# EAGLE board OpenReader_Board (EAGLE 9.7.0)
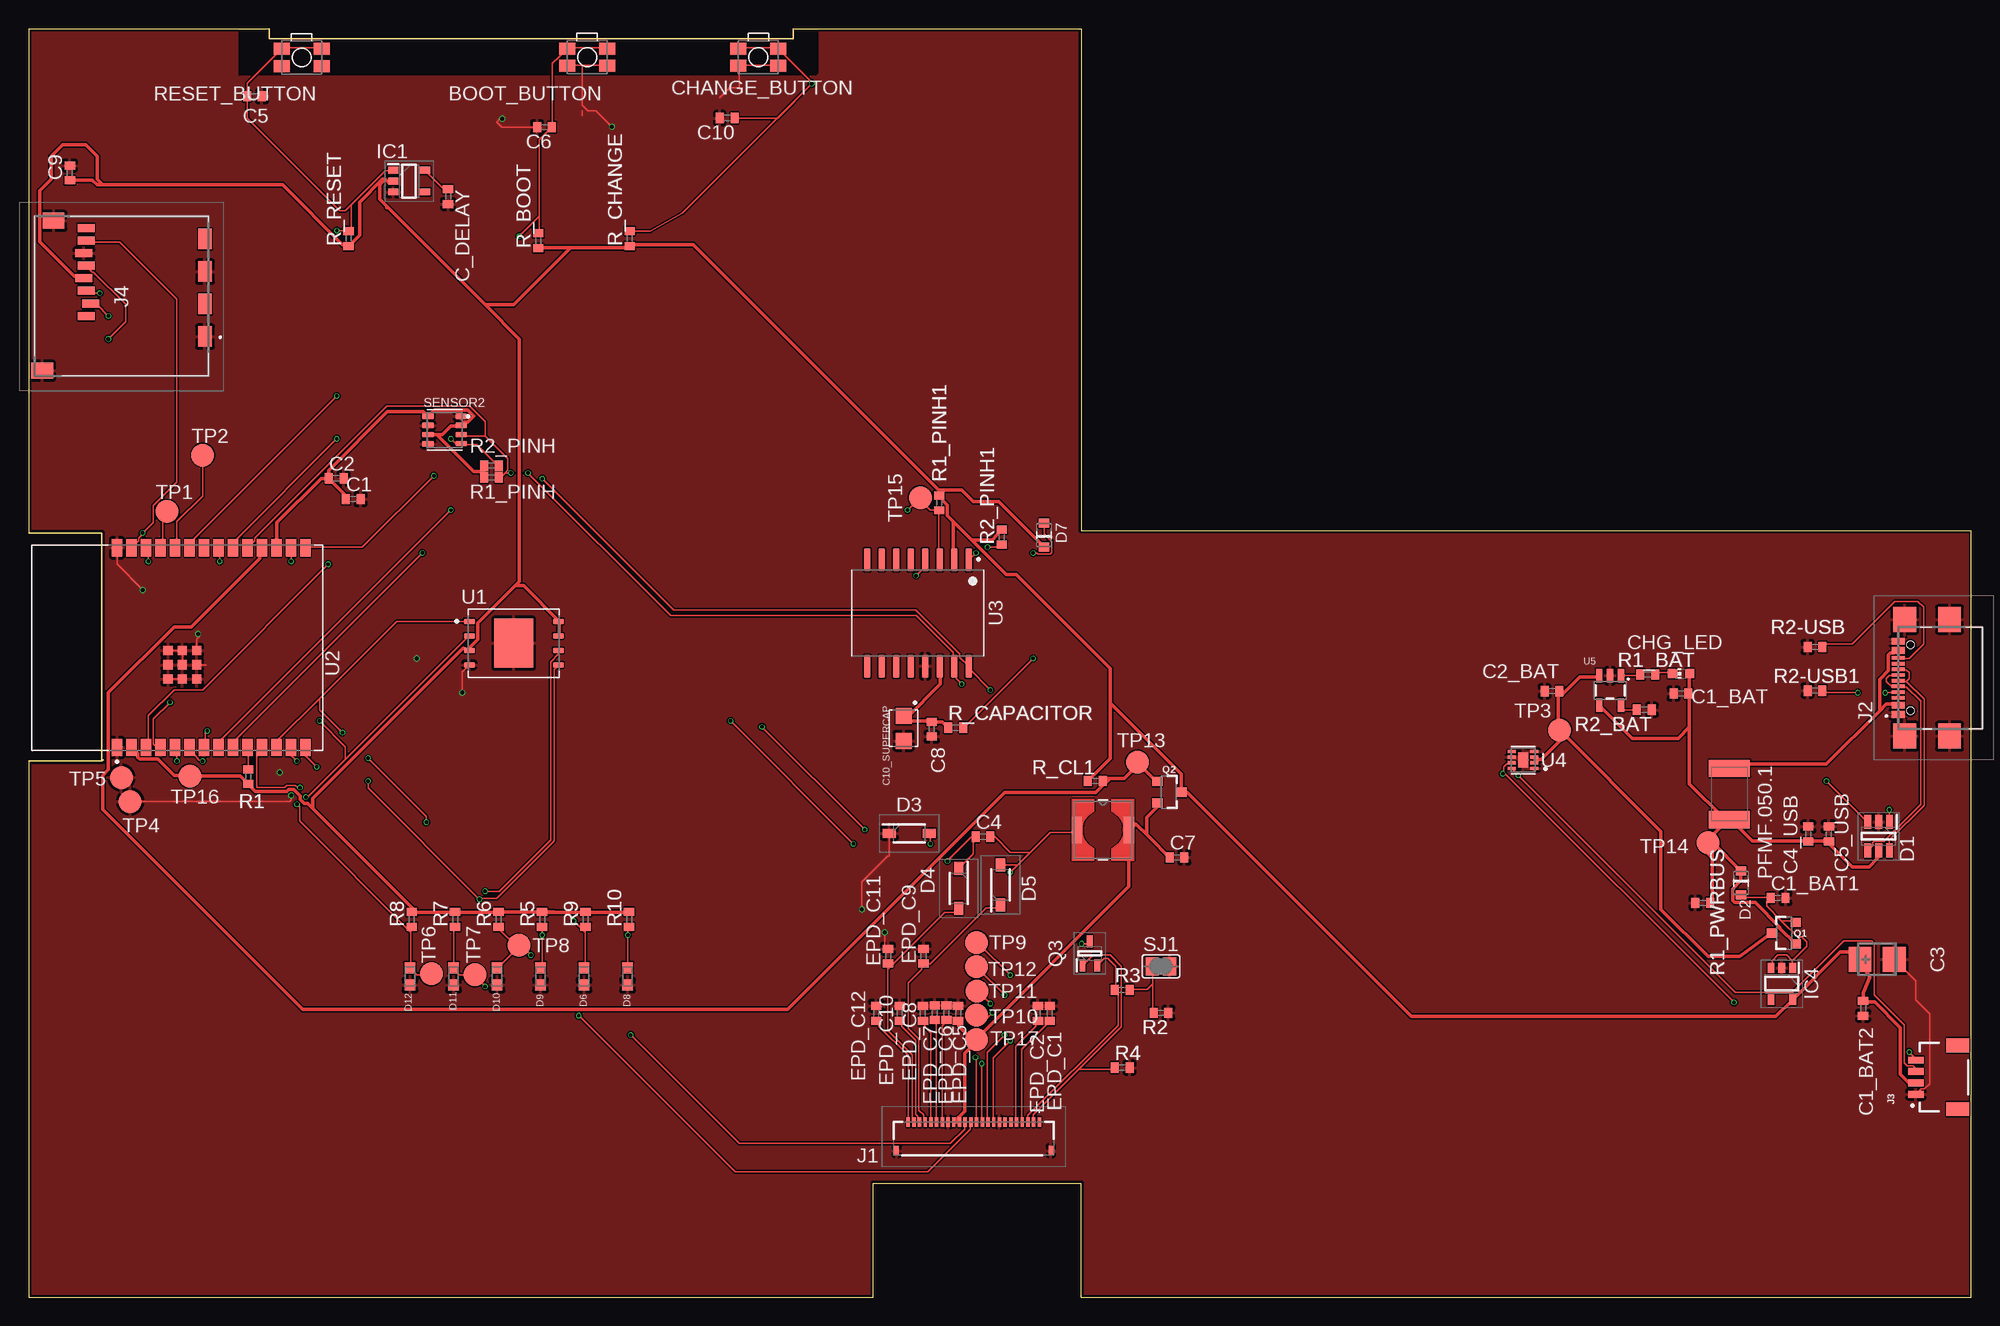
[diagram p0: board, top side]
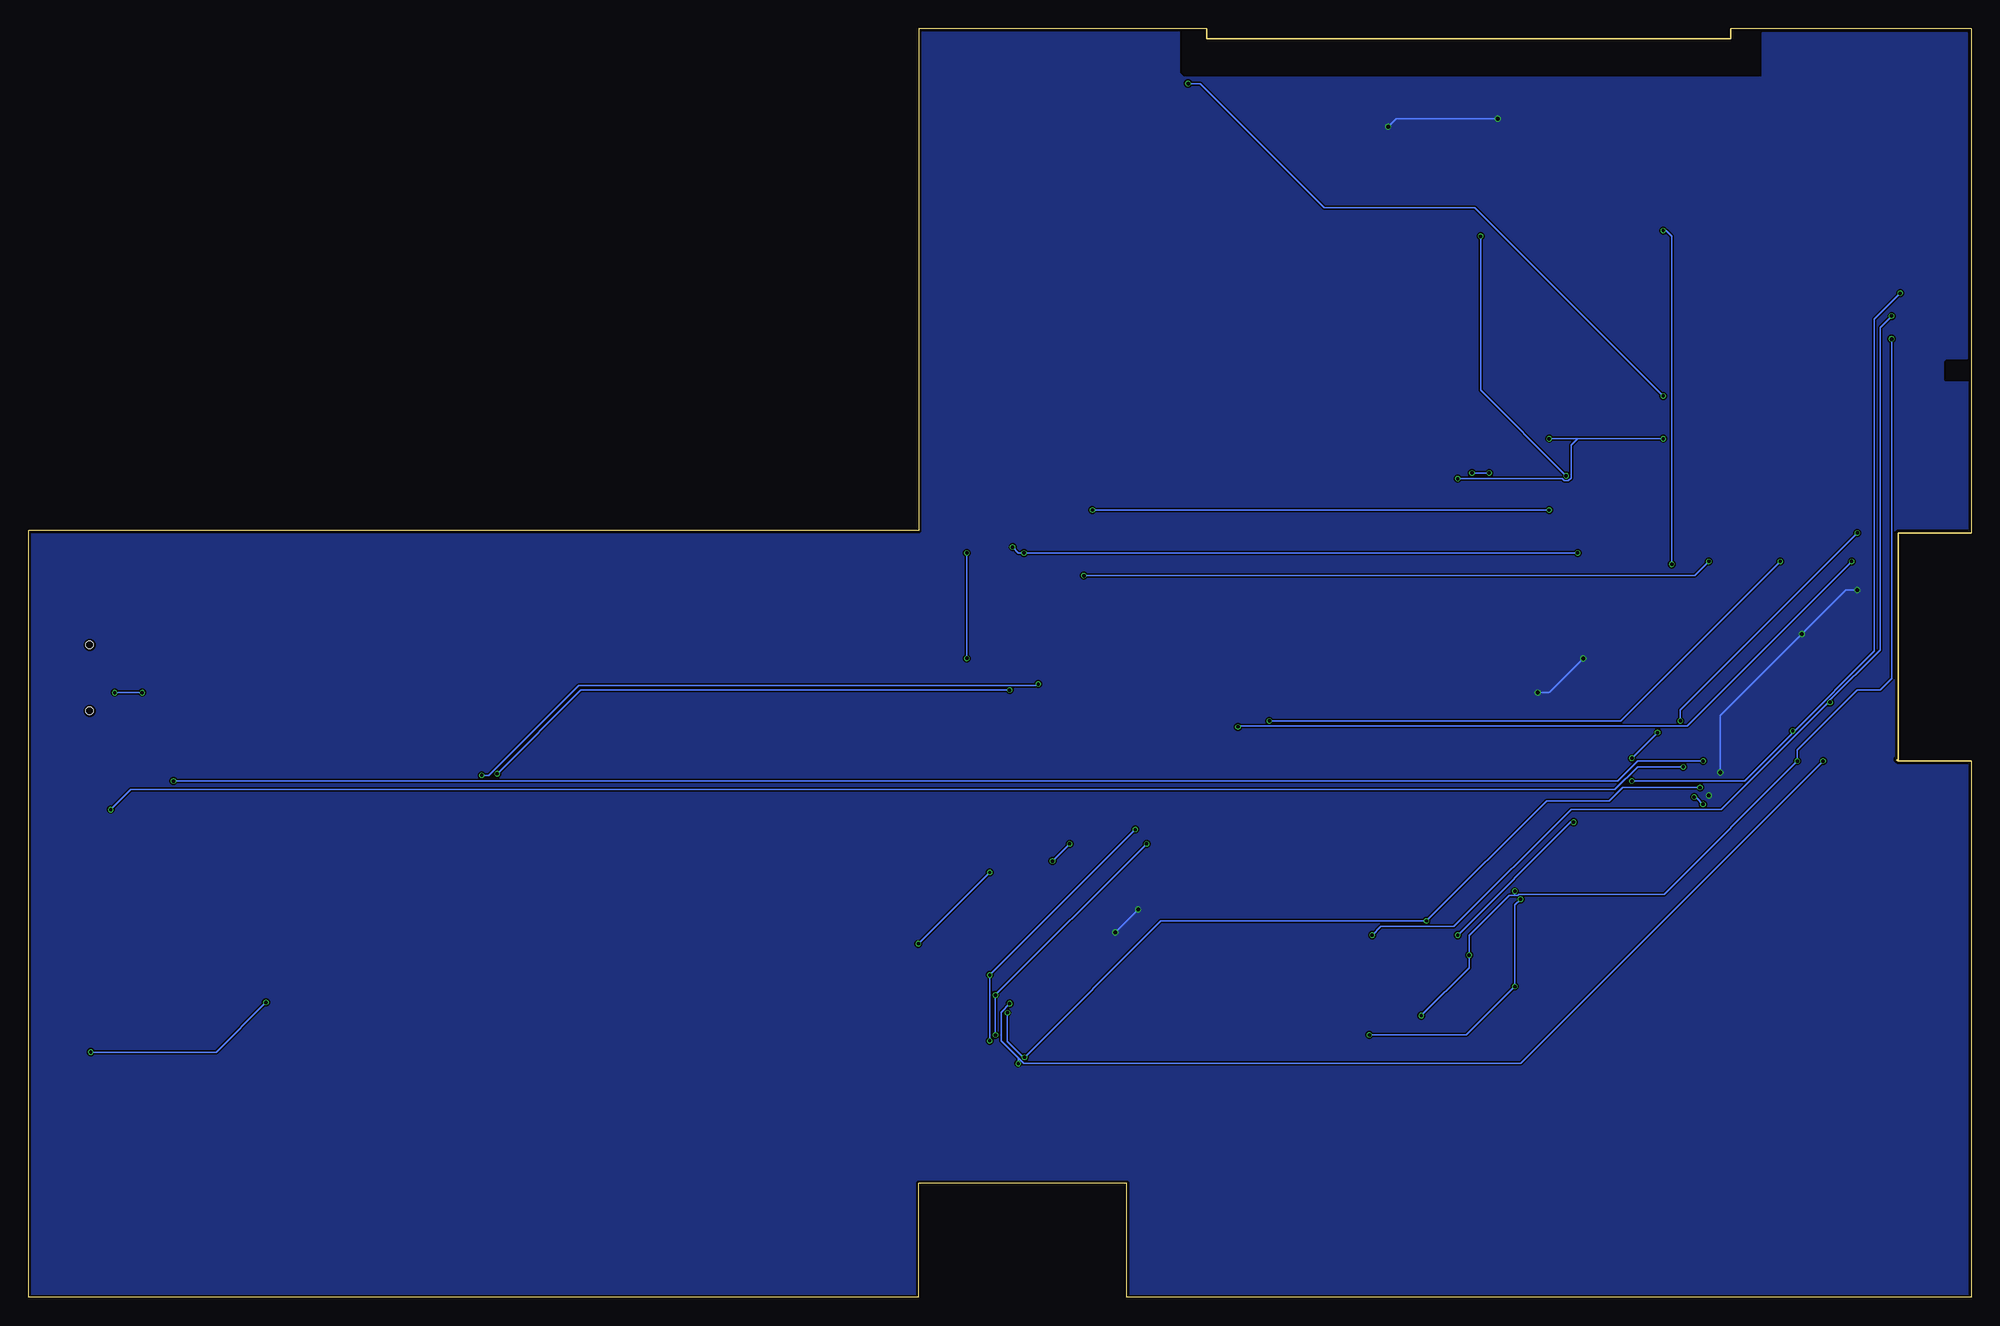
[diagram p1: board, bottom side, seen from below]

Size 170.2 x 111.2 mm. Coordinates in mm from the lower left corner, seen from the top.
Outline: 6.55,47.12 6.43,47
Outline: 6.43,47 0,47 0,0 74,0 74,10 92.2,10 92.2,0 170.2,0 170.2,67.2 92.2,67.2 92.2,111.2 67,111.2 67,110.3 21.1,110.3 21.1,111.2 0,111.2 0,67 6.43,67 6.43,47
Copper layers (1*16): Top 0.035mm / dielectric 1.6mm / Bottom 0.035mm
Design rules "jlcpcb-2layers.dru *": minimum track width 0.15mm, minimum drill 0.3mm, track to track 5mil, track to pad 5mil, pad to pad 5mil, via to via 5mil, smd to smd 5mil, copper to edge 0.2mm, drill to drill 6mil, minimum pad ring 10mil, minimum via ring 3mil, stop-mask expansion 4mil, vias tented up to drill 0mil, thermal gap 10mil
Net classes: 1 POWER_ROUTES: width 0.3 mm

## Footprints (pad centres in the part's own frame; a part is rotated, then mirrored left to right if it is on the bottom)
MYBUTTON = smd 1.4 x 1.05: 1 1.75,0.75; 2 -1.75,0.75; 3 -1.75,-0.75; 4 1.75,-0.75
EAGLE-LTSPICE_C0402 = smd 0.7 x 0.9: 1 -0.65,0; 2 0.65,0
RCL_CT3528 = smd 2 x 2.2: + -1.5,0; - 1.5,0
CAPCP3225X100N = smd 1.4 x 1.4: 1 -1.1,0; 2 1.1,0
ADAFRUIT_CHIP-LED0603 = smd 0.8 x 0.8: A 0,-0.75; C 0,0.75
SOT95P280X145-6N = smd 1.2 x 0.6: 1 -1.25,0.95; 2 -1.25,0; 3 -1.25,-0.95; 4 1.25,-0.95; 5 1.25,0; 6 1.25,0.95
ESP32_WROVER_AVX---SD0805S020S1R0_AVX_SD0805S020S1R0_0 = smd 0.8 x 0.9: 1 -1.05,0; 2 1.05,0
SOD3716X135N = smd 1.15 x 0.8: 1 -1.75,0; 2 1.75,0
DIOC1608X36N = smd 0.97 x 0.94: 1 -0.75,0; 2 0.75,0
SOT95P280X125-5N = smd 0.9 x 0.6: 1 -1.4,0.95; 2 -1.4,0; 3 -1.4,-0.95; 4 1.4,-0.95; 5 1.4,0.95
SOT95P280X120-5N = smd 0.9 x 0.6: 1 -1.4,0.95; 2 -1.4,0; 3 -1.4,-0.95; 4 1.4,-0.95; 5 1.4,0.95
FH34SRJ24S05SH99 = smd 0.3 x 0.8: 1 5.75,1.45; 2 5.25,1.45; 3 4.75,1.45; 4 4.25,1.45; 5 3.75,1.45; 6 3.25,1.45; 7 2.75,1.45; 8 2.25,1.45; 9 1.75,1.45; 10 1.25,1.45; 11 0.75,1.45; 12 0.25,1.45; 13 -0.25,1.45; 14 -0.75,1.45; 15 -1.25,1.45; 16 -1.75,1.45; 17 -2.25,1.45; 18 -2.75,1.45; 19 -3.25,1.45; 20 -3.75,1.45; 21 -4.25,1.45; 22 -4.75,1.45; 23 -5.25,1.45; 24 -5.75,1.45 | smd 0.4 x 0.8: MP1 6.75,-1.05; MP2 -6.75,-1.05
SAMACSYS_PARTS_USB4110GFA = smd 0.3 x 1.15: A1 -3.35,3.678; A4 -2.55,3.678; A5 -1.25,3.678; A6 -0.25,3.678; A7 0.25,3.678; A8 1.25,3.678; A9 2.55,3.678; A12 3.35,3.678; B1 3.05,3.678; B4 2.25,3.678; B5 1.75,3.678; B6 0.75,3.678; B7 -0.75,3.678; B8 -1.75,3.678; B9 -2.25,3.678; B12 -3.05,3.678 | smd 2.18 x 2: MP1 -5.11,-0.827; MP2 5.11,-0.827; MP3 -5.11,3.103; MP4 5.11,3.103 | hole 0.65: -2.89,2.603; 2.89,2.603
JST04_1MM_RA = smd 0.6 x 1.35: 1 -1.5,0; 2 -0.5,0; 3 0.5,0; 4 1.5,0 | smd 1.2 x 2: NC1 2.8,-3.675; NC2 -2.8,-3.675
112ATAARR03ATTEND = smd 1.8 x 1.2: G1 10.6,10.4; G2 4.9,10.4; S1 7.75,10.4; S2 2.05,10.4 | smd 1.4 x 1.9: G3 13.6,-3.85; G4 0.45,-2.85 | smd 0.7 x 1.5: P1 8.8,0; P2 7.7,0.4; P3 6.6,0; P4 5.5,-0.2; P5 4.4,0; P6 3.3,-0.2; P7 2.2,0; P8 1.1,0
IND_4828-WE-TPC_WRE = smd 0.889 x 2.286: 1 -2.286,0; 2 2.286,0
ESP32C6_VARISTOR_CT/CN1812 = smd 1.5 x 3.6: 1 -2.25,0; 2 2.25,0
ESP32_WROVER_SPARKFUN-DISCRETESEMI_SOT23-3 = smd 0.8 x 0.9: 1 -0.95,-1; 2 0.95,-1; 3 0,1.1
SOT65P210X110-3N = smd 1.05 x 0.5: 1 -1.05,0.65; 2 -1.05,-0.65; 3 1.05,0
ESP32_WROVER_EAGLE-LTSPICE_R0402 = smd 0.7 x 0.9: 1 -0.65,0; 2 0.65,0
ESP32_WROVER_BME680_PSON80P300X300X100-8N = smd 1.016 x 0.5: 1 1.458,1.2; 2 1.458,0.4; 3 1.458,-0.4; 4 1.458,-1.2; 5 -1.458,-1.22; 6 -1.458,-0.4; 7 -1.458,0.4; 8 -1.458,1.2
SJ = smd 1.168 x 1.6: 1 -0.762,0; 2 0.762,0
TP20R = smd 2 x 2: TP 0,0
SON127P600X800X80-9N = smd 0.94 x 0.44: 1 -3.895,1.905; 2 -3.895,0.635; 3 -3.895,-0.635; 4 -3.895,-1.905; 5 3.895,-1.905; 6 3.895,-0.635; 7 3.895,0.635; 8 3.895,1.905 | smd 3.4 x 4.3: 9 0,0
XCVR_ESP32-C6-WROOM-1-N8 = smd 1.5 x 0.9: 1 -8.75,5.26; 2 -8.75,3.99; 3 -8.75,2.72; 4 -8.75,1.45; 5 -8.75,0.18; 6 -8.75,-1.09; 7 -8.75,-2.36; 8 -8.75,-3.63; 9 -8.75,-4.9; 10 -8.75,-6.17; 11 -8.75,-7.44; 12 -8.75,-8.71; 13 -8.75,-9.98; 14 -8.75,-11.25; 15 8.75,-11.25; 16 8.75,-9.98; 17 8.75,-8.71; 18 8.75,-7.44; 19 8.75,-6.17; 20 8.75,-4.9; 21 8.75,-3.63; 22 8.75,-2.36; 23 8.75,-1.09; 24 8.75,0.18; 25 8.75,1.45; 26 8.75,2.72; 27 8.75,3.99; 28 8.75,5.26 | smd 0.8 x 0.8: 29_1 -2.755,0.79; 29_2 -1.505,0.79; 29_3 -0.255,0.79; 29_4 -2.755,-0.46; 29_5 -1.505,-0.46; 29_6 -0.255,-0.46; 29_7 -2.755,-1.71; 29_8 -1.505,-1.71; 29_9 -0.255,-1.71
SOIC127P1032X265-16N = smd 2.05 x 0.59: 1 -4.655,4.445; 2 -4.655,3.175; 3 -4.655,1.905; 4 -4.655,0.635; 5 -4.655,-0.635; 6 -4.655,-1.905; 7 -4.655,-3.175; 8 -4.655,-4.445; 9 4.655,-4.445; 10 4.655,-3.175; 11 4.655,-1.905; 12 4.655,-0.635; 13 4.655,0.635; 14 4.655,1.905; 15 4.655,3.175; 16 4.655,4.445
SON50P200X200X80-9N = smd 0.76 x 0.27: 1 -0.985,0.75; 4 -0.985,-0.75; 5 0.985,-0.75; 8 0.985,0.75 | smd 0.775 x 0.305: 2 -0.985,0.25; 3 -0.985,-0.25 | smd 0.775 x 0.27: 6 0.985,-0.25; 7 0.985,0.25 | smd 0.9 x 1.3: 9 0,0
SOT23-5 = smd 0.55 x 1.2: 1 -0.95,-1.3; 2 0,-1.3; 3 0.95,-1.3; 4 0.95,1.3; 5 -0.95,1.3

## Placement (x,y rotation side)
BOOT_BUTTON  BUTTON_CUSYOMV1""  [MYBUTTON]  48.93,108.67 180 top
C1  100nF  [EAGLE-LTSPICE_C0402]  28.45,69.97 0 top
C1_BAT  4.7uF  [EAGLE-LTSPICE_C0402]  144.75,52.92 180 top
C1_BAT1  4.7uF  [EAGLE-LTSPICE_C0402]  153.26,35.01 0 top
C1_BAT2  4.7uF  [EAGLE-LTSPICE_C0402]  160.71,25.34 270 top
C2  100nF  [EAGLE-LTSPICE_C0402]  26.95,71.78 0 top
C2_BAT  4.7uF  [EAGLE-LTSPICE_C0402]  133.45,53.13 180 top
C3  100uF TANT  [RCL_CT3528]  161.93,29.63 0 top
C4  4.7uF/25V  [EAGLE-LTSPICE_C0402]  83.61,40.38 0 top
C4_USB  100nF  [EAGLE-LTSPICE_C0402]  155.9,40.61 90 top
C5  1uF  [EAGLE-LTSPICE_C0402]  19.8,105.26 0 top
C5_USB  4.7uF  [EAGLE-LTSPICE_C0402]  157.71,40.61 90 top
C6  100nF  [EAGLE-LTSPICE_C0402]  45.2,102.55 180 top
C7  10uF  [EAGLE-LTSPICE_C0402]  100.61,38.57 0 top
C8  100nF  [EAGLE-LTSPICE_C0402]  79.12,49.79 270 top
C9  100nF  [EAGLE-LTSPICE_C0402]  3.62,98.55 90 top
C10  100nF  [EAGLE-LTSPICE_C0402]  61.2,103.36 180 top
C10_SUPERCAP  CPH3225A  [CAPCP3225X100N]  76.66,49.87 270 top
C_DELAY  100nF  [EAGLE-LTSPICE_C0402]  36.75,96.47 270 top
CHANGE_BUTTON  BUTTON_CUSYOMV1""  [MYBUTTON]  63.93,108.67 180 top
CHG_LED  [ADAFRUIT_CHIP-LED0603]  144.76,54.67 90 top
D1  USBLC6-2SC6Y  [SOT95P280X145-6N]  162.07,40.42 270 top
D2  ESP32_WROVER_AVX---SD0805S020S1R0_AVX_SD0805S020S1R0_0_0AVX_SD0805S020S1R0_0_0  [ESP32_WROVER_AVX---SD0805S020S1R0_AVX_SD0805S020S1R0_0]  150.01,36.34 270 top
D3  MBR0530"  [SOD3716X135N]  77.15,40.67 0 top
D4  MBR0530"  [SOD3716X135N]  81.48,35.85 270 top
D5  MBR0530"  [SOD3716X135N]  85.14,36.15 90 top
D6  PGB1010603MR"  [DIOC1608X36N]  48.66,28.13 90 top
D7  ESP32_WROVER_AVX---SD0805S020S1R0_AVX_SD0805S020S1R0_0_0AVX_SD0805S020S1R0_0_0  [ESP32_WROVER_AVX---SD0805S020S1R0_AVX_SD0805S020S1R0_0]  88.96,66.81 90 top
D8  PGB1010603MR"  [DIOC1608X36N]  52.47,28.13 90 top
D9  PGB1010603MR"  [DIOC1608X36N]  44.85,28.13 90 top
D10  PGB1010603MR"  [DIOC1608X36N]  41.04,28.13 90 top
D11  PGB1010603MR"  [DIOC1608X36N]  37.23,28.13 90 top
D12  PGB1010603MR"  [DIOC1608X36N]  33.42,28.13 90 top
EPD_C1  1uF/50V  [EAGLE-LTSPICE_C0402]  89.45,24.91 90 top
EPD_C2  1uF/50V  [EAGLE-LTSPICE_C0402]  88.42,24.91 90 top
EPD_C5  0.1uF/50V  [EAGLE-LTSPICE_C0402]  81.43,24.91 90 top
EPD_C6  1uF/50V  [EAGLE-LTSPICE_C0402]  80.4,24.96 90 top
EPD_C7  1uF/50V  [EAGLE-LTSPICE_C0402]  79.38,24.96 90 top
EPD_C8  1uF/50V  [EAGLE-LTSPICE_C0402]  78.35,24.91 90 top
EPD_C9  1uF/50V  [EAGLE-LTSPICE_C0402]  78.4,29.91 90 top
EPD_C10  1uF/50V  [EAGLE-LTSPICE_C0402]  76.32,24.91 90 top
EPD_C11  1uF/50V  [EAGLE-LTSPICE_C0402]  75.3,29.91 90 top
EPD_C12  1uF/50V  [EAGLE-LTSPICE_C0402]  74.27,24.91 90 top
IC1  BD5229G-TR  [SOT95P280X125-5N]  33.34,97.83 0 top
IC4  XC6220A331MR-G  [SOT95P280X120-5N]  153.59,27.49 270 top
J1  FH34SRJ-24S-0.5SH_99_  [FH34SRJ24S05SH99]  82.8,13.92 0 top
J2  SAMACSYS_PARTS_USB4110-GF-A  [SAMACSYS_PARTS_USB4110GFA]  167.45,54.3 90 top
J3  QWIIC_RIGHT_ANGLE  [JST04_1MM_RA]  165.32,19.3 90 top
J4  112A-TAAR-R03_ATTEND  [112ATAARR03ATTEND]  5.05,94.81 270 top
L1  68uH  [IND_4828-WE-TPC_WRE]  94.12,40.97 0 top
PFMF.050.1  ESP32C6_VARISTORCN1812  [ESP32C6_VARISTOR_CT/CN1812]  148.99,44.12 270 top
Q1  20V/4.2A/52mΩ/1.4W  [ESP32_WROVER_SPARKFUN-DISCRETESEMI_SOT23-3]  153.8,31.93 90 top
Q2  20V/4.2A/52mΩ/1.4W  [ESP32_WROVER_SPARKFUN-DISCRETESEMI_SOT23-3]  99.89,44.28 270 top
Q3  SI1308EDL-T1-GE3  [SOT65P210X110-3N]  92.97,30.15 90 top
R1  10K  [ESP32_WROVER_EAGLE-LTSPICE_R0402]  19.24,45.64 90 top
R1_BAT  200  [ESP32_WROVER_EAGLE-LTSPICE_R0402]  141.85,54.59 0 top
R1_PINH  10K  [ESP32_WROVER_EAGLE-LTSPICE_R0402]  40.55,71.86 180 top
R1_PINH1  10K  [ESP32_WROVER_EAGLE-LTSPICE_R0402]  79.77,69.63 90 top
R1_PWRBUS  100K  [ESP32_WROVER_EAGLE-LTSPICE_R0402]  146.66,34.58 0 top
R2  2.2  [ESP32_WROVER_EAGLE-LTSPICE_R0402]  99.2,24.94 180 top
R2-USB  5K1  [ESP32_WROVER_EAGLE-LTSPICE_R0402]  156.5,57.01 180 top
R2-USB1  5K1  [ESP32_WROVER_EAGLE-LTSPICE_R0402]  156.5,53.18 0 top
R2_BAT  2K  [ESP32_WROVER_EAGLE-LTSPICE_R0402]  141.55,51.5 180 top
R2_PINH  10K  [ESP32_WROVER_EAGLE-LTSPICE_R0402]  40.55,72.89 180 top
R2_PINH1  10K  [ESP32_WROVER_EAGLE-LTSPICE_R0402]  85.26,66.63 90 top
R3  0.47  [ESP32_WROVER_EAGLE-LTSPICE_R0402]  95.8,26.95 0 top
R4  10K  [ESP32_WROVER_EAGLE-LTSPICE_R0402]  95.8,20.14 0 top
R5  10K  [ESP32_WROVER_EAGLE-LTSPICE_R0402]  44.99,33.13 90 top
R6  10K  [ESP32_WROVER_EAGLE-LTSPICE_R0402]  41.18,33.13 90 top
R7  10K  [ESP32_WROVER_EAGLE-LTSPICE_R0402]  37.37,33.13 90 top
R8  10K  [ESP32_WROVER_EAGLE-LTSPICE_R0402]  33.56,33.13 90 top
R9  10K  [ESP32_WROVER_EAGLE-LTSPICE_R0402]  48.8,33.13 90 top
R10  10K  [ESP32_WROVER_EAGLE-LTSPICE_R0402]  52.61,33.13 90 top
R_BOOT  10K  [ESP32_WROVER_EAGLE-LTSPICE_R0402]  44.65,92.6 90 top
R_CAPACITOR  15  [ESP32_WROVER_EAGLE-LTSPICE_R0402]  81.21,49.93 0 top
R_CHANGE  10K  [ESP32_WROVER_EAGLE-LTSPICE_R0402]  52.66,92.8 90 top
R_CL1  10K  [ESP32_WROVER_EAGLE-LTSPICE_R0402]  93.45,45.27 0 top
R_RESET  10K  [ESP32_WROVER_EAGLE-LTSPICE_R0402]  28.04,92.8 90 top
RESET_BUTTON  BUTTON_CUSYOMV1""  [MYBUTTON]  23.93,108.66 180 top
SENSOR2  BME688  [ESP32_WROVER_BME680_PSON80P300X300X100-8N]  36.45,76.02 0 top
SJ1  [SJ]  99.2,29.02 180 top
TP1  TPTP20R  [TP20R]  12.13,68.88 0 top
TP2  TPTP20R  [TP20R]  15.26,73.8 0 top
TP3  TPTP20R  [TP20R]  134.13,49.72 0 top
TP4  TPTP20R  [TP20R]  8.91,43.46 0 top
TP5  TPTP20R  [TP20R]  8.13,45.56 0 top
TP6  TPTP20R  [TP20R]  35.28,28.37 270 top
TP7  TPTP20R  [TP20R]  39.1,28.27 270 top
TP8  TPTP20R  [TP20R]  42.95,30.87 270 top
TP9  TPTP20R  [TP20R]  83.05,31.11 0 top
TP10  TPTP20R  [TP20R]  83.03,24.73 0 top
TP11  TPTP20R  [TP20R]  83.07,26.85 0 top
TP12  TPTP20R  [TP20R]  83.04,28.98 0 top
TP13  TPTP20R  [TP20R]  97.13,46.92 0 top
TP14  TPTP20R  [TP20R]  147.13,39.84 0 top
TP15  TPTP20R  [TP20R]  78.13,70.08 0 top
TP16  TPTP20R  [TP20R]  14.13,45.68 0 top
TP17  TPTP20R  [TP20R]  83.03,22.6 0 top
U1  W25Q512JVEIQ  [SON127P600X800X80-9N]  42.51,57.34 0 top
U2  ESP32-C6-WROOM-1-N8  [XCVR_ESP32-C6-WROOM-1-N8]  13.01,56.95 90 top
U3  DS3231SN#  [SOIC127P1032X265-16N]  77.9,59.98 270 top
U4  MAX17048G+T10  [SON50P200X200X80-9N]  130.93,47.1 180 top
U5  MCP73831  [SOT23-5]  138.54,53.19 180 top

## Library data of the parts
BOOT_BUTTON CHANGE_BUTTON CHG_LED D2-D12 PFMF.050.1 Q1 Q2 R1 R1_BAT R1_PINH R1_PINH1 R1_PWRBUS R2 R2-USB R2-USB1 R2_BAT R2_PINH R2_PINH1 R3-R10 R_BOOT R_CAPACITOR R_CHANGE R_CL1 R_RESET RESET_BUTTON SJ1 TP1-TP17 = DeskAssistant v19 v1
C1 C1_BAT C1_BAT1 C1_BAT2 C2 C2_BAT C4 C4_USB C5 C5_USB C6-C10 C_DELAY EPD_C1 EPD_C2 EPD_C5-EPD_C12 = DeskAssistant v19 v1; SPICEMODEL: NONE; SPICEPREFIX: C
C3 = DeskAssistant v19 v1; SPICEPREFIX: C
C10_SUPERCAP = DeskAssistant v19 v1; AVAILABILITY: Not in stock; CHECK_PRICES: https://www.snapeda.com/parts/CPH3225A/Seiko+Instruments/view-part/?ref=eda; DESCRIPTION: 11 mF (EDLC) Supercapacitor 3.3 V 1210 (3225 Metric) - -; MF: Seiko Instruments; MP: CPH3225A; PACKAGE: 1210 Seiko; PRICE: None; PURCHASE-URL: https://www.snapeda.com/api/url_track_click_mouser/?unipart_id=562593&manufacturer=Seiko Instruments&part_name=CPH3225A&search_term=None; SNAPEDA_LINK: https://www.snapeda.com/parts/CPH3225A/Seiko+Instruments/view-part/?ref=snap
D1 = DeskAssistant v19 v1; AVAILABILITY: In Stock; CHECK_PRICES: https://www.snapeda.com/parts/USBLC6-2SC6Y/STMicroelectronics/view-part/?ref=eda; DESCRIPTION: 17V Clamp 5A (8/20µs) Ipp Tvs Diode Surface Mount SOT-23-6; MF: STMicroelectronics; MP: USBLC6-2SC6Y; PACKAGE: SOT-23-6 STMicroelectronics; PRICE: None; SNAPEDA_LINK: https://www.snapeda.com/parts/USBLC6-2SC6Y/STMicroelectronics/view-part/?ref=snap
IC1 = DeskAssistant v19 v1; DESCRIPTION: Voltage Detector with Adjustable Delay Time: CMOS processes are utilized to develop high precision, low current consumption CMOS reset ICs that allow arbitrary setting of the delay time. The extensive lineup includes both Nch Open Drain and CMOS output types in a wide range of detection voltages (from 2.3V to 6.0V, in 0.1V steps), enabling selection of the ideal solution based on customer requirements. In addition, the entire series is of course both lead-free and RoHS-compliant.; HEIGHT: 1.25mm; MANUFACTURER_NAME: ROHM Semiconductor; MANUFACTURER_PART_NUMBER: BD5229G-TR; MOUSER_PART_NUMBER: 755-BD5229G-TR; MOUSER_PRICE-STOCK: https://www.mouser.co.uk/ProductDetail/ROHM-Semiconductor/BD5229G-TR?qs=4kLU8WoGk0vvnhrrYwdszw%3D%3D
IC4 = DeskAssistant v19 v1; DESCRIPTION: LDO Voltage Regulators; HEIGHT: 1.2mm; MANUFACTURER_NAME: Torex; MANUFACTURER_PART_NUMBER: XC6220A331MR-G; MOUSER_PART_NUMBER: 865-XC6220A331MR-G; MOUSER_PRICE-STOCK: https://www.mouser.co.uk/ProductDetail/Torex-Semiconductor/XC6220A331MR-G?qs=AsjdqWjXhJ8ZSWznL1J0gg%3D%3D
J1 = DeskAssistant v19 v1; DESCRIPTION: 24 Position FFC, FPC Connector Contacts, Top and Bottom 0.020" (0.50mm) Surface Mount, Right Angle; HEIGHT: 1.1mm; MANUFACTURER_NAME: Hirose; MANUFACTURER_PART_NUMBER: FH34SRJ-24S-0.5SH(99); MOUSER_PART_NUMBER: 798-FH34SRJ24S05SH99; MOUSER_PRICE-STOCK: https://www.mouser.co.uk/ProductDetail/Hirose-Connector/FH34SRJ-24S-0.5SH99?qs=vcbW%252B4%252BSTIpKBl5ap9J8Fw%3D%3D
J2 = DeskAssistant v19 v1; DESCRIPTION: CONN USB 2.0 TYPE-C R/A SMT; HEIGHT: 3.26mm; MANUFACTURER_NAME: GCT (GLOBAL CONNECTOR TECHNOLOGY); MANUFACTURER_PART_NUMBER: USB4110-GF-A; MOUSER_PART_NUMBER: 640-USB4110-GF-A; MOUSER_PRICE-STOCK: https://www.mouser.co.uk/ProductDetail/GCT/USB4110-GF-A?qs=KUoIvG%2F9IlYiZvIXQjyJeA%3D%3D
J3 = DeskAssistant v19 v1; PROD_ID: CONN-13694
J4 = DeskAssistant v19 v1; DESCRIPTION: Micro SD Card Socket, Push-Push Type, Top Mount, SMT, H=1.83mm, 10u; HEIGHT: 1.9mm; MANUFACTURER_NAME: ATTEND; MANUFACTURER_PART_NUMBER: 112A-TAAR-R03 ATTEND
L1 = DeskAssistant v19 v1; COPYRIGHT: Copyright (C) 2024 Ultra Librarian. All rights reserved.; MANUFACTURER_PART_NUMBER: 744043680; MFR_NAME: Wurth Electronics
Q3 = DeskAssistant v19 v1; AVAILABILITY: In Stock; CHECK_PRICES: https://www.snapeda.com/parts/SI1308EDL-T1-GE3/Vishay+Siliconix/view-part/?ref=eda; DESCRIPTION: Si1308EDL-T1-GE3 N-channel MOSFET Transistor, 1.5 A, 30 V, 3-Pin SC-70 | Siliconix / Vishay SI1308EDL-T1-GE3; MF: Vishay Siliconix; MP: SI1308EDL-T1-GE3; PACKAGE: SOT-323 Vishay Semiconductor; PRICE: None; PURCHASE-URL: https://www.snapeda.com/api/url_track_click_mouser/?unipart_id=274603&manufacturer=Vishay Siliconix&part_name=SI1308EDL-T1-GE3&search_term=None; SNAPEDA_LINK: https://www.snapeda.com/parts/SI1308EDL-T1-GE3/Vishay+Siliconix/view-part/?ref=snap
SENSOR2 = DeskAssistant v19 v1; AVAILABILITY: Unavailable; DESCRIPTION: Integrated Environmental Unit; MF: Bosch Sensortec; MP: BME680; PACKAGE: LGA-8 Bosch Tools; PRICE: None
U1 = DeskAssistant v19 v1; AVAILABILITY: In Stock; CHECK_PRICES: https://www.snapeda.com/parts/W25Q512JVEIQ/Winbond+Electronics/view-part/?ref=eda; DESCRIPTION: FLASH - NOR Memory IC 512Mb (64M x 8) SPI - Quad I/O 133 MHz 8-WSON (8x6); MF: Winbond Electronics; MP: W25Q512JVEIQ; PACKAGE: Package; PRICE: None; SNAPEDA_LINK: https://www.snapeda.com/parts/W25Q512JVEIQ/Winbond+Electronics/view-part/?ref=snap
U2 = DeskAssistant v19 v1; AVAILABILITY: In Stock; CHECK_PRICES: https://www.snapeda.com/parts/ESP32-C6-WROOM-1-N8/Espressif+Systems/view-part/?ref=eda; DESCRIPTION: Multiprotocol Modules ESP32-C6 module, Wi-Fi 6 in 2.4 GHz band, Bluetooth 5, Zigbee 3.0 and Thread. ESP34-WROOM Compatible - ENGINEERING SAMPLE; MF: Espressif Systems; MP: ESP32-C6-WROOM-1-N8; PACKAGE: None; PRICE: None; SNAPEDA_LINK: https://www.snapeda.com/parts/ESP32-C6-WROOM-1-N8/Espressif+Systems/view-part/?ref=snap
U3 = DeskAssistant v19 v1; AVAILABILITY: In Stock; CHECK_PRICES: https://www.snapeda.com/parts/DS3231SN%23/Analog+Devices/view-part/?ref=eda; DESCRIPTION: Extremely Accurate I²C-Integrated RTC/TCXO/Crystal; MF: Analog Devices; MP: DS3231SN#; PACKAGE: SOIC-16 Maxim; PRICE: None; PURCHASE-URL: https://www.snapeda.com/api/url_track_click_mouser/?unipart_id=99048&manufacturer=Analog Devices&part_name=DS3231SN#&search_term=None; SNAPEDA_LINK: https://www.snapeda.com/parts/DS3231SN%23/Analog+Devices/view-part/?ref=snap
U4 = DeskAssistant v19 v1; AVAILABILITY: In Stock; CHECK_PRICES: https://www.snapeda.com/parts/MAX17048G+T10/Analog+Devices/view-part/?ref=eda; DESCRIPTION: 3µA 1-Cell/2-Cell Fuel Gauge with ModelGauge; MF: Analog Devices; MP: MAX17048G+T10; PACKAGE: TDFN-8 Maxim; PRICE: None; PURCHASE-URL: https://www.snapeda.com/api/url_track_click_mouser/?unipart_id=329239&manufacturer=Analog Devices&part_name=MAX17048G+T10&search_term=None; SNAPEDA_LINK: https://www.snapeda.com/parts/MAX17048G+T10/Analog+Devices/view-part/?ref=snap
U5 = SparkFun-IC-Power; PROD_ID: IC-09995

## Nets
3V3 [POWER_ROUTES]: C1_BAT2.1 C3.+ C9.1 D7.1 IC1.2 IC4.5 J3.2 J4.P4 Q2.3 R1.1 R1_PINH1.2 R2_PINH1.2 R5.2 R6.2 R7.2 R8.2 R9.2 R10.2 R_BOOT.1 R_CHANGE.1 R_CL1.1 R_RESET.1 TP16.TP U1.3 U1.7 U1.8 U2.2 U3.2
32KHZ: R2_PINH1.1 U2.9 U3.1
DN: D1.4 J2.A7 J2.B7
DP: D1.6 J2.A6 J2.B6
EPD_3V3 [POWER_ROUTES]: C7.1 EPD_C5.1 J1.15 J1.16 L1.2 Q2.2 TP17.TP
EPD_3V3_C [POWER_ROUTES]: Q2.1 R_CL1.2 TP13.TP U2.18
EPD_BUSY: J1.9 TP9.TP U2.26
EPD_CS: D6.2 J1.12 R9.1 TP10.TP U2.11
EPD_DC: J1.11 TP11.TP U2.5
EPD_RST: J1.10 TP12.TP U2.21
FLASH_CS: D9.2 R5.1 U1.1 U2.12
GDR: J1.2 Q3.1 R4.1
GND: BOOT_BUTTON.1 BOOT_BUTTON.2 C1.2 C1_BAT1.2 C1_BAT2.2 C1_BAT.2 C2.2 C2_BAT.2 C3.- C4_USB.2 C5.2 C5_USB.2 C6.2 C7.2 C8.2 C9.2 C10.2 C10_SUPERCAP.2 C_DELAY.2 CHANGE_BUTTON.1 CHANGE_BUTTON.2 D1.2 D3.1 D6.1 D8.1 D9.1 D10.1 D11.1 D12.1 EPD_C1.2 EPD_C2.2 EPD_C5.2 EPD_C6.2 EPD_C7.2 EPD_C8.2 EPD_C9.2 EPD_C10.2 EPD_C11.2 EPD_C12.2 IC1.3 IC4.2 J1.8 J1.17 J1.MP1 J1.MP2 J2.A1 J2.A12 J2.B1 J2.B12 J2.MP1 J2.MP2 J2.MP3 J2.MP4 J3.1 J4.G1 J4.G2 J4.G3 J4.G4 J4.P6 R1_PWRBUS.1 R2-USB1.1 R2-USB.2 R2.1 R2_BAT.1 R4.2 RESET_BUTTON.1 RESET_BUTTON.2 SENSOR2.1 SENSOR2.5 SENSOR2.7 SJ1.1 TP4.TP TP5.TP U1.4 U1.9 U2.1 U2.28 U2.29_1 U2.29_2 U2.29_3 U2.29_4 U2.29_5 U2.29_6 U2.29_7 U2.29_8 U2.29_9 U3.13 U4.1 U4.4 U4.6 U4.9 U5.2
GPIO8: R1.2 U2.10
I2C_PW [POWER_ROUTES]: C1.1 C2.1 R1_PINH.2 R2_PINH.2 SENSOR2.2 SENSOR2.6 SENSOR2.8 U2.17
INT_RTC: R1_PINH1.1 TP15.TP U2.8 U3.3
IO/BOOT: BOOT_BUTTON.3 BOOT_BUTTON.4 C6.1 R_BOOT.2 U2.15
IO/CHANGE: C10.1 CHANGE_BUTTON.3 CHANGE_BUTTON.4 R_CHANGE.2 U2.23
MISO: D12.2 J4.P7 R8.1 TP6.TP U1.2 U2.27
MOSI: D11.2 J1.14 J4.P3 R7.1 TP7.TP U1.5 U2.7
N$1: R1_BAT.1 U5.1
N$2: CHG_LED.C R1_BAT.2
N$3: C1_BAT1.1 D2.2 IC4.1 IC4.3 Q1.2
N$4: R2_BAT.2 U5.5
N$5: J2.A5 R2-USB1.2
N$7: C_DELAY.1 IC1.5
N$8: C4.1 D3.2 D4.1
N$9: EPD_C12.1 J1.24
N$11: EPD_C10.1 J1.22
N$13: EPD_C8.1 J1.20
N$14: J2.B5 R2-USB.1
N$15: EPD_C7.1 J1.19
N$16: EPD_C6.1 J1.18
N$21: EPD_C2.1 J1.5
N$22: EPD_C1.1 J1.4
N$24: D7.2 R_CAPACITOR.2
PREVGH: D5.1 EPD_C9.1 J1.21
PREVGL: D4.2 EPD_C11.1 J1.23
RESE: J1.3 Q3.2 R3.1
RESE': R2.2 R3.2 SJ1.2
RESET: C5.1 IC1.1 R_RESET.2 RESET_BUTTON.3 RESET_BUTTON.4 U2.3
RTC_RST: U2.16 U3.4
RX: TP2.TP U2.24
SCK: D10.2 J1.13 J4.P5 R6.1 TP8.TP U1.6 U2.6
SCL: J3.4 R2_PINH.1 SENSOR2.4 U2.20 U3.16 U4.7
SDA: J3.3 R1_PINH.1 SENSOR2.3 U2.19 U3.15 U4.8
SRC: C4.2 D5.2 L1.1 Q3.3
SS_SD: D8.2 J4.P2 R10.1 U2.4
TX: TP1.TP U2.25
USB_D+: D1.1 U2.14
USB_D-: D1.3 U2.13
VBAT [POWER_ROUTES]: C2_BAT.1 Q1.3 TP3.TP U4.2 U4.3 U5.3
VBUS [POWER_ROUTES]: C1_BAT.1 C4_USB.1 C5_USB.1 CHG_LED.A D1.5 D2.1 PFMF.050.1.2 Q1.1 R1_PWRBUS.2 TP14.TP U5.4
VRTC [POWER_ROUTES]: C8.1 C10_SUPERCAP.1 R_CAPACITOR.1 U3.14
VUSB [POWER_ROUTES]: J2.A4 J2.A9 J2.B4 J2.B9 PFMF.050.1.1

## Tracks (layer width: path | path; a pad name or v marks a point on that pad's centre or on a via)
3V3
  Top 0.3: 46,33.75 48.75,33.75 R9.2 49,33.75 52.5,33.75 R10.2 | 46,33.75 45,33.75 R5.2 | 46,33.75 46.03,33.78 R6.2 41,33.75 37.5,33.75 R7.2 37.25,33.75 33.75,33.75 R8.2 33.75,34 24.88,42.88 | 24.45,43.3 24.48,43.27 | 46.5,59.25 43.38,62.38 42.62,62.38 | 46.5,59.25 46.5,58 U1.7 | 46.5,59.25 U1.8 | J4.P4 4.75,89.5 4,89.5 0.97,92.53 0.97,95.17 1,95.2 1,97 2,98 2,100 3,101 5,101 6,100 6,98 6.5,97.5 | 31.5,95.5 30.75,96.25 30.75,97.5 31.25,98 | 31.25,98 31.5,97.75 31.75,97.75 IC1.2 | 47.5,92 52.5,92 R_CHANGE.1 52.75,92.25 58.25,92.25 79.75,70.75 | 47.5,92 42.5,87 40,87 | 31.5,95.5 40,87 | 6.5,97.5 22.25,97.5 27.5,92.25 28,92.25 R_RESET.1 29,93.11 29,96 31,98 31.25,98 | 6.5,97.5 6,97.5 5.6,97.9 C9.1 3.75,97.77 | 40,87 43,84 43,62.75 42.62,62.38 | J3.2 165.25,18.75 164.75,18.75 163.97,19.53 163.97,23.62 161.71,25.88 160.71,25.88 C1_BAT2.1 160.71,26.71 161.27,28.06 C3.+ 160.25,29.5 159.47,30.27 158.72,30.27 IC4.5 153.07,24.62 121.13,24.62 101.5,44.25 101,44.25 Q2.3 100.99,45.87 94.75,52.11 | R_CL1.1 93,45.5 94.75,47.25 94.75,52.11 | R2_PINH1.2 84.43,66.38 82.62,66.38 | 85,69.75 82.75,69.75 81.75,70.75 79.75,70.75 | 85,69.75 | 81,68 81,64.75 U3.2 | 94.75,52.11 94.75,55.11 86.52,63.33 85.67,63.33 82.62,66.38 | 79.75,70.75 80,70.5 R1_PINH1.2 79.77,70.17 80.5,69.44 80.5,68.5 81,68 | 47.5,92 44.7,92 R_BOOT.1 | 85,69.75 86.89,67.86 D7.1 | 81,68 82.62,66.38 | U2.2 9.56,47.66 9.56,47.34 9.72,47.17 11.33,47.17 12.75,45.75 14.06,45.75 TP16.TP 18.55,45.68 R1.1 19.65,44.58 19.65,44.55 19.85,44.35 22.6,44.35 22.78,44.53 23.22,44.53 23.79,43.95 23.79,43.65 24.17,43.27 24.48,43.27 | 42.62,62.38 39.36,59.11 39.36,57.67 38.62,56.92 U1.3 38.07,56.92 24.88,43.73 24.88,42.88
  Top 0.3: 31.5,95.5 31.39,95.5 | 24.88,42.88 24.48,43.27
32KHZ  (via drill 0.3)
  Top 0.15: v84,65.75 85.25,65.75 R2_PINH1.1 | v83,65.25 82.5,64.75 U3.1 | v34.5,65.25 18,48.75 18,48.25 U2.9
  Bottom 0.15: v84,65.75 83.5,65.25 v83,65.25 v34.5,65.25
DN
  Top 0.15: J2.A7 163.75,54.5 163,54.5 162.75,54.25 162.75,54 163.25,53.5 163.75,53.5 J2.B7 164,53.5 164.5,53.5 165.75,52.25 165.75,43.21 162.51,39.97 161.69,39.97 161.57,39.85 161.57,39.62 D1.4
DP
  Top 0.15: 164.5,54 164,54 J2.A6 | 164.5,54 164.75,54.25 164.75,54.75 164.5,55 164,55 J2.B6 | 164.5,54 166.05,52.45 166.05,43.12 163.02,40.09 D1.6
EPD_3V3
  Top 0.3: 97.94,40.56 97.19,41.31 97,41.5 96.5,41 L1.2 96.38,40.88 96.38,36 83,22.62 TP17.TP | C7.1 99.88,38.62 98.25,40.25 97.94,40.56 | Q2.2 98.88,43.25 98.88,43 97.94,42.06 97.94,40.56 | J1.15 81.5,15.38 81.12,15.38 J1.16 82,16.32 82,21.38 82.88,22.25 TP17.TP | EPD_C5.1 81.5,24.25 81.5,23.75 82.88,22.38 83,22.5 TP17.TP
EPD_3V3_C
  Top 0.3: 94.75,45.5 96,45.5 97.25,46.75 | 94.75,45.5 94.25,45.5 R_CL1.2 | 97.25,46.75 98.75,45.25 Q2.1 | 97.25,46.75 TP13.TP | 94.75,45.5 93.5,44.25 85.5,44.25 66.5,25.25 24,25.25 6.5,42.75 6.5,45.75 7,46.25 7,53 12.75,58.75 14.25,58.75 20.25,64.75 20.25,65.5 U2.18
EPD_BUSY  (via drill 0.3)
  Top 0.15: v86,22.5 84.5,21 84.5,15.5 J1.9 | v86,28.25 83.25,31 TP9.TP | v10.5,64.5 10.5,65.5 U2.26 | v64.25,50 v73.25,41
  Bottom 0.15: v86,22.5 v86,28.25 v73.25,41 | v10.5,64.5 24.9,50.1 64.15,50.1 v64.25,50
EPD_CS  (via drill 0.3)
  Top 0.15: TP10.TP 83.25,24.5 84,24.5 v84.45,24.95 | 48.75,32 48.75,29 D6.2 | 48.75,32 48.75,32.25 R9.1 | U2.11 20,47.75 20,44.7 22.45,44.7 22.64,44.88 23.36,44.88 23.56,44.68 v23.78,44.68 | 48.75,32 v47.75,33 | v82.95,21.05 83,21 83,15.42 J1.12
  Bottom 0.15: v23.78,44.68 23.8,44.7 30.55,44.7 31.72,43.53 37.22,43.53 v47.75,33 71,33 v82.95,21.05 83.05,21.05 84.45,22.45 v84.45,24.95
EPD_DC  (via drill 0.3)
  Top 0.15: v83.5,20.5 83.5,15.5 J1.11 | v84.25,25.75 83.25,26.75 TP11.TP | v13,47 13,48 U2.5
  Bottom 0.15: 83.5,21 85,22.5 85,25 v84.25,25.75 | 83.5,21 83,20.5 39.5,20.5 v13,47 | v83.5,20.5 83.5,21
EPD_RST  (via drill 0.3)
  Top 0.15: v85.5,23 84,21.5 84,15.5 J1.10 | v85.5,26.5 83.25,28.75 TP12.TP | v16.75,64.5 16.75,65.5 U2.21 | v72.25,39.75 61.5,50.5 v61.5,50.53
  Bottom 0.15: v85.5,23 v85.5,26.5 v72.25,39.75 | v61.5,50.53 30.72,50.53 v16.75,64.5
FLASH_CS  (via drill 0.3)
  Top 0.15: R5.1 45,32.25 v45,31.75 45,29 D9.2 | 25.5,52.5 21.75,48.75 21.75,48.25 U2.12 | 25.5,52.5 32.25,59.25 38.5,59.25 U1.1 | v34.85,41.65 34.85,42.15 v29.75,47.25 | v27.5,49.5 25.5,51.5 25.5,52.5
  Bottom 0.15: v45,31.75 35.1,41.65 v34.85,41.65 | v27.5,49.5 v29.75,47.25
GDR
  Top 0.15: 92,20 88,16 88,15.5 J1.2 | 92,20 95,20 R4.1 | Q3.1 92.5,29.25 93.25,30 94.74,30 95.73,29.02 95.73,23.73 92,20
GND  (via drill 0.35)
  Top 0.15: 48.5,108 50.5,108 BOOT_BUTTON.2 | 48.5,108 47.25,108 BOOT_BUTTON.1 | U2.29_5 13.5,55.5 13.5,56.5 U2.29_6 U2.29_3 | CHANGE_BUTTON.2 65.5,108 62.25,108 CHANGE_BUTTON.1 62.25,107.86 62.25,106.05 62.28,106.01 | 48.5,103.55 48.5,104 | 48.5,108 48.5,104.5 49,104 49.7,104 v51.1,102.6 | U2.29_4 U2.29_1 | C3.- 165.32,27.73 165.32,26.07 166.53,24.86 166.53,18.74 166.08,18.3 165.82,18.3 J3.1 | 62.4,105.89 62.28,106.01 | 62.28,106.01 61.42,106.01 60.55,105.15 | C6.2 41.45,102.55 41,103 41.3,103.3 v41.5,103.3 | U1.4 38,54.82 v38,53 | U2.29_8 15.55,55.45
  Top 0.152: EPD_C11.2 75,30.86 v75,32 | U2.29_9 14.72,57.72 15,58 v14.85,58.15 | v10,62 7.75,64.25 U2.28 | v73,34 73,36.41 75.27,38.68 75.4,38.67 D3.1 | TP4.TP 22.86,43.46 23,43.6 v23,44
  Bottom 0.15: v41.5,103.3 50.4,103.3 v51.1,102.6 | v38,53 37,53 v34,56 | v14.85,58.15 22,51 v22,46
  Bottom 0.152: v75,32 v73,34 | v14.85,58.15 11,62 v10,62
  pour Top: 6.66,46.76 6.64,46.74 6.62,46.72 0.08,46.72 0.08,0.08 73.92,0.08 73.92,10.02 73.94,10.04 73.96,10.06 73.98,10.08 92.32,10.08 92.34,10.06 92.36,10.04 92.38,10.02 92.38,0.18 170.02,0.18 170.02,67.02 92.08,67.02 92.06,67.04 92.04,67.06 92.02,67.08 92.02,68.52 92.04,68.54 92.09,68.6 92.04,68.66 92.02,68.68 92.02,111.02 69.43,111.02 69.28,110.87 69.28,107.28 69.26,107.26 69.04,107.04 69.02,107.02 18.53,107.02 18.44,106.94 18.42,106.92 18.38,106.92 18.36,106.94 18.34,106.96 18.32,106.98 18.32,111.02 0.18,111.02 0.18,67.28 6.62,67.28 6.64,67.26 6.66,67.24 6.68,67.22 6.68,46.78
  pour Bottom: 0.27,46.72 0.28,46.72 0.28,0.08 73.92,0.08 73.92,10.02 73.94,10.04 73.96,10.06 73.98,10.08 92.32,10.08 92.34,10.06 92.36,10.04 92.38,10.02 92.38,0.18 170.02,0.18 170.02,67.02 92.08,67.02 92.06,67.04 92.04,67.06 92.02,67.08 92.02,111.02 69.43,111.02 69.38,110.97 69.38,107.28 69.36,107.26 69.04,106.94 69.02,106.92 18.38,106.92 18.36,106.94 18.34,106.96 18.32,106.98 18.32,110.82 0.38,110.82 0.38,82.28 2.22,82.28 2.24,82.26 2.46,82.04 2.48,82.02 2.48,80.38 2.46,80.36 2.34,80.24 2.32,80.22 0.33,80.22 0.28,80.17 0.28,67.38 6.52,67.38 6.54,67.36 6.76,67.14 6.78,67.12 6.78,47.43 6.86,47.34 6.88,47.32 6.88,46.98 6.86,46.96 6.64,46.74 6.62,46.72
GPIO8
  Top 0.15: R1.2 19.25,46.5 19.25,48 U2.10
I2C_PW
  Top 0.3: 39.88,72.38 39.88,72.88 R2_PINH.2 | 39.88,72.38 39.88,71.88 R1_PINH.2 | 35.88,75.62 36.25,75.62 37,76.38 37.88,76.38 SENSOR2.2 38.18,76.69 38.49,76.69 39.02,77.22 38.49,77.75 35.52,77.75 SENSOR2.8 34.59,77.62 31.44,77.62 26.3,72.48 C2.1 | 35.88,75.62 SENSOR2.6 | 39.88,72.38 39,72.38 35.88,75.5 35.88,75.62 | U2.17 21.75,65.75 21.75,67.9 25.63,71.78 C2.1 | C2.1 27.8,70.28 C1.1
INT_RTC  (via drill 0.3)
  Top 0.15: 78,70 79,69 79.75,69 R1_PINH1.1 79.75,68.75 79.75,64.75 U3.3 | v37,69 16.75,48.75 16.75,48.25 U2.8 | 78,70 v77,69 | 78,70 TP15.TP
  Bottom 0.15: v77,69 v37,69
IO/BOOT  (via drill 0.3)
  Top 0.15: BOOT_BUTTON.3 50.5,109.5 47.25,109.5 BOOT_BUTTON.4 47,109.25 46.5,108.75 46.49,108.75 45.9,108.15 45.9,102.6 C6.1 | 44.75,94.75 44.75,101.45 C6.1 | 44.75,94.75 44.75,93.25 R_BOOT.2 | v35.5,72 29.25,65.75 24.5,65.75 U2.15 | 44.75,94.75 v43,93 | 45.55,102.45 C6.1
  Bottom 0.15: v35.5,72 43,79.5 v43,93
IO/CHANGE  (via drill 0.3, 0.35)
  Top 0.15: CHANGE_BUTTON.4 62.25,109.5 65.5,109.5 CHANGE_BUTTON.3 66.45,108.65 66.46,108.65 68.62,106.49 v68.62,106.38 | v68.62,106.38 57.25,95 54.46,93.45 R_CHANGE.2 52.5,93.5 | v68.62,106.38 65.61,103.36 C10.1 | v27,79 14.25,66.25 14.25,65.75 U2.23
  Bottom 0.15: v27,79 43.5,95.5 56.7,95.5 67.58,106.38 v68.62,106.38
MISO  (via drill 0.3)
  Top 0.15: J4.P7 5.25,92.5 8,92.5 13,87.5 13,71.45 10.93,69.38 10.93,67.93 v10,67 10,66.9 9.64,66.53 9.64,66.32 U2.27 | 33.5,32 33.5,29 D12.2 33.5,28.75 34,28.25 35.25,28.25 TP6.TP | 33.5,32 33.5,32.25 R8.1 | 27.75,47.15 38.58,57.98 U1.2 | 33.5,32 23.75,41.75 23.75,42.98 v23.52,43.21 | 27.75,47.15 27.75,48.25 25.5,50.5 v25.5,50.53 | 27.75,47.15 24.46,43.86 v24.3,43.86
  Bottom 0.15: v10,67 25.5,51.5 v25.5,50.53 | v23.52,43.21 24.08,43.78 24.21,43.78 v24.3,43.86
MOSI  (via drill 0.3)
  Top 0.15: R7.1 37.25,32.25 37.25,29 D11.2 37.25,28.75 37.75,28.25 39,28.25 | v52.75,23 62.25,13.5 80.75,13.5 82,14.75 82,15.25 J1.14 | 39,28.25 v40,27.25 | U1.5 46.05,55.01 46.05,40.01 41.02,34.97 39.57,34.97 v39.5,34.9 29.75,44.65 v29.75,45.25 | v6.25,88 5.25,88 J4.P3 | 39,28.25 TP7.TP | v15.65,49.65 15.5,49.5 15.5,48.33 U2.7
  Bottom 0.15: v52.75,23 44.25,23 v40,27.25 40,34.4 v39.5,34.9 | v6.25,88 8.5,85.75 8.5,56.64 15.5,49.64 15.5,49.59 15.55,49.55 | v15.65,49.65 15.55,49.55 | v29.75,45.25 19.84,45.25 15.55,49.55
N$1
  Top 0.15: R1_BAT.1 141,54.5 U5.1
N$2
  Top 0.15: CHG_LED.C 144,54.75 142.5,54.75 R1_BAT.2
N$3
  Top 0.15: 154.5,29.5 154,30 153.25,30 152.75,29.5 152.75,29 IC4.3 | 154.5,29.5 154.5,29 IC4.1 | 153.55,33 154.75,33 Q1.2 | 153.55,33 152.25,34.3 152.25,34.65 C1_BAT1.1 152.59,35.05 150.04,35.05 D2.2 | 154.5,29.5 155.75,30.75 155.75,31.17 155.33,31.58 154.97,31.58 153.55,33
N$4
  Top 0.15: R2_BAT.2 139.5,51.5 139.25,51.75 U5.5
N$5  (via drill 0.3)
  Top 0.15: v160.25,53 157.25,53 R2-USB1.2 | J2.A5 163.72,53 v162.65,53
  Bottom 0.15: v162.65,53 v160.25,53
N$7
  Top 0.15: IC1.5 34.75,98.75 36.25,97.25 36.75,97.25 C_DELAY.1
N$8  (via drill 0.3)
  Top 0.15: 82.82,40.29 82.75,40.25 82.75,38.87 D4.1 81.4,37.6 | 82.82,40.29 C4.1 | v80.5,38.25 82.54,40.29 82.82,40.29 | D3.2 79,40.57 v79,39.75
  Bottom 0.15: v80.5,38.25 v79,39.75
N$9
  Top 0.15: EPD_C12.1 74.5,24.25 74.5,23.75 77.05,21.2 J1.24
N$11
  Top 0.15: EPD_C10.1 76.5,24.25 76.5,23.75 77.7,22.55 77.7,16.06 77.9,15.85 77.9,15.52 J1.22
N$13
  Top 0.15: EPD_C8.1 78.5,24.25 78.5,23.75 79.05,23.2 J1.20
N$14
  Top 0.15: R2-USB.1 157.25,57.25 159.75,57.25 163.5,61 165.5,61 166,60.5 166,57.25 164.75,56 164,56 J2.B5
N$15
  Top 0.15: J1.19 79.5,15.5 79.5,24.25 EPD_C7.1
N$16
  Top 0.15: EPD_C6.1 80.4,24.15 80.05,23.8 J1.18
N$21
  Top 0.15: J1.5 86.5,15.5 86.5,22 88.25,23.75 88.25,24.25 EPD_C2.1
N$22
  Top 0.15: J1.4 87,15.5 87,21.75 89.5,24.25 EPD_C1.1
N$24  (via drill 0.3)
  Top 0.15: v88,56 82,50 R_CAPACITOR.2 | v88,65.25 88.33,65.25 88.43,65.16 89.49,65.16 89.61,65.28 89.61,66.24 88.96,66.9 D7.2
  Bottom 0.15: v88,65.25 v88,56
PREVGH
  Top 0.15: D5.1 84.86,34.12 83.88,34.12 79,29.25 78.5,29.25 EPD_C9.1 78.25,29.25 78.25,28.75 77.05,27.55 77.05,23.59 78,22.64 78,16.4 78.4,16 78.4,15.52 J1.21
PREVGL
  Top 0.15: 75.25,28.75 75.25,29.25 EPD_C11.1 | 75.25,28.75 80.25,33.75 81.13,33.75 D4.2 | J1.23 77.4,15.52 77.4,21.24 75.25,23.39 75.25,28.75
RESE
  Top 0.15: Q3.2 94.22,29.7 94.55,29.7 95.25,29 95.25,27 R3.1 95.45,26.65 95.45,23.84 87.55,15.94 J1.3
RESE'
  Top 0.15: 98.5,27.5 98.5,27 98.5,25 R2.2 | SJ1.2 98.5,29 98.5,28 98.5,27.5 | R3.2 96.5,27 98,27 98.5,27.5
RESET  (via drill 0.3)
  Top 0.15: RESET_BUTTON.3 25.5,109.5 22.25,109.5 RESET_BUTTON.4 22,109.25 19.15,106.4 C5.1 19.15,103.35 27.25,95.25 | 28.25,95.75 28.25,93.5 R_RESET.2 28,93.5 v27,93.5 | 28.25,95.75 31.25,98.75 31.75,98.75 IC1.1 | 27.75,95.25 28.25,95.75 | v26.25,64.25 15.25,53.25 12.75,53.25 10.5,51 10.5,48.25 U2.3
  Top 0.152: 27.25,95.25 27.75,95.25
  Bottom 0.15: v26.25,64.25 26.25,93 26.75,93.5 v27,93.5
RTC_RST  (via drill 0.3)
  Top 0.15: v23,64.5 23,65.5 U2.16 | v77.75,63.25 78.5,64 78.5,64.5 U3.4
  Bottom 0.15: v23,64.5 24.25,63.25 v77.75,63.25
RX
  Top 0.15: U2.24 13,65.75 13,68 15.25,70.25 15.25,73.75 TP2.TP
SCK  (via drill 0.3, 0.35)
  Top 0.15: v48.2,24.7 61.9,11 78.75,11 82.5,14.75 82.5,15.25 J1.13 | v44,30 43,31 TP8.TP | R6.1 41.25,32.25 42.75,30.75 TP8.TP | D10.2 41.25,29 43,30.75 TP8.TP | v15.25,47 14.93,47.09 U2.6 | J4.P5 5.6,89.86 5.68,89.86 8.5,87.05 8.5,85.5 v7,84 | U1.6 46.41,56.38 45.73,55.71 45.73,40.08 41.25,35.6 v40,35.6
  Bottom 0.15: v48.2,24.7 44,28.9 v44,30 44,31.75 40.5,35.25 40,35.25 | v7,84 7,54.25 8,53.25 10,53.25 15.25,48 v15.25,47 26.92,35.33 39.68,35.33 39.76,35.25 40,35.25 | v40,35.6 40,35.25
SCL  (via drill 0.3)
  Top 0.15: 129.25,46 129.25,46.5 129.5,46.75 129.75,46.75 U4.7 | v149.4,25.85 129.25,46 | v164.75,21.5 165.25,21 J3.4 | R2_PINH.1 41,73 39.25,74.75 38,74.75 SENSOR2.4 37.75,74.75 37.5,74.75 v37,75.25 | v27,75.25 18,66.25 18,65.75 U2.20 | v45,71.75 56.5,60.25 77.71,60.25 81.57,56.39 81.57,56.1 U3.16 82.34,55.16 84.25,53.25 v84.25,53.22 | v129.15,45.9 129.25,46
  Bottom 0.15: v149.4,25.85 153.75,21.5 v164.75,21.5 | v37,75.25 34.5,75.25 | 34.5,75.25 v27,75.25 | 34.5,75.25 35.07,74.68 35.07,71.82 35.32,71.57 35.68,71.57 35.86,71.75 v45,71.75 | v84.25,53.22 121.82,53.22 v129.15,45.9
SDA  (via drill 0.3)
  Top 0.15: 161,31.25 159,31.25 154.5,26.75 149.5,26.75 v130.5,45.75 130,46.25 U4.8 | 41.75,72.25 42,72.5 42,73.5 40,75.5 | 41.75,72.25 41.5,72 41.25,72 R1_PINH.1 | 40,75.5 38,75.5 SENSOR2.3 | v43.75,72.25 56.25,59.75 77.75,59.75 81,56.5 81,55.5 U3.15 81.25,55.25 81.25,54.25 v81.75,53.75 | 161.7,31 161.7,26.5 164.32,23.88 164.32,20.54 164.57,20.3 165.08,20.3 165.38,20 165.12,20 J3.3 | 40,75.5 40,76.74 38.64,78.1 31.36,78.1 19.8,66.53 19.8,66.32 U2.19 | 41.75,72.25 v42.25,72.25
  Top 0.152: 161,31.25 161.45,31.25 161.7,31
  Bottom 0.15: v42.25,72.25 v43.75,72.25 | v130.5,45.75 129.9,45.75 122,53.65 81.85,53.65 v81.75,53.75
SRC  (via drill 0.3)
  Top 0.15: 84.5,40.25 C4.2 84.62,40.38 86,39 87.75,39 | v92.25,31 92.75,31 Q3.3 | v86,37.25 86.65,37.9 | 87.75,39 86.88,38.12 86.65,37.9 | 87.75,39 89.5,40.75 91.75,40.75 L1.1 | D5.2 86.65,37.9
  Bottom 0.15: v86,37.25 v92.25,31
SS_SD  (via drill 0.3)
  Top 0.15: R10.1 52.5,32.25 v52.5,31.75 52.5,29 D8.2 | v7,86 6,87 5.5,87 J4.P2 | v12.39,52.14 10.94,50.69 10.94,48.52 11.26,48.2 U2.4
  Bottom 0.15: 12.5,52.25 8,56.75 8,85 v7,86 | v52.5,31.75 51.75,32.5 45.35,32.5 35.07,42.78 21.92,42.78 12.5,52.2 12.5,52.25 | 12.5,52.25 v12.39,52.14
TX
  Top 0.15: TP1.TP 11.75,68.5 11.75,65.75 U2.25
USB_D+  (via drill 0.3)
  Top 0.15: v163,42.75 163,41.75 D1.1 | v25.25,46.5 24.26,47.49 U2.14
  Bottom 0.15: v163,42.75 161.25,44.5 31.25,44.5 29.25,46.5 v25.25,46.5
USB_D-  (via drill 0.3)
  Top 0.15: v157.5,45.25 161,41.75 D1.3 | v23.5,47 23,47.5 23,48 U2.13
  Bottom 0.15: v157.5,45.25 31,45.25 29.25,47 v23.5,47
VBAT
  Top 0.3: 132,47.12 132,47.25 U4.3 | 132,47.12 132,46.88 U4.2 | Q1.3 149.9,29.88 147.12,29.88 143,34 143,40.85 TP3.TP | TP3.TP 134,49.75 134,53.12 C2_BAT.1 134.12,53.12 134.38,52.88 135.88,54.38 137.5,54.38 U5.3 | 132,47.12 132.5,47.12 134.5,49.12 TP3.TP
VBUS
  Top 0.3: CHG_LED.A 145.5,54.5 145.5,53 C1_BAT.1 145.5,52.5 145.5,50 | 157.5,40 156,40 C4_USB.1 155.5,40 151,40 149,42 PFMF.050.1.2 | 157.5,40 159.75,37.75 161.25,37.75 162,38.5 162,39 D1.5 | 157.5,40 C5_USB.1 | 147.5,38.5 147.5,39.9 D2.1 150.01,36.53 149.28,35.8 149.28,34.77 149.44,34.61 151.26,34.61 153.43,32.45 153.43,32.35 Q1.1 | 147.5,38.5 147.5,35 R1_PWRBUS.2 | 147.5,38.5 147,39 147,39.5 TP14.TP 147,40 148.5,41.5 PFMF.050.1.2 | 145.5,50 145.5,45 148.5,42 PFMF.050.1.2 | U5.4 140.48,49 144.5,49 145.5,50
VRTC
  Top 0.3: 76.88,50.75 76.75,50.88 C10_SUPERCAP.1 76.88,50.75 | 76.88,50.75 77.12,50.5 79,50.5 C8.1 80.05,50.44 R_CAPACITOR.1 | 76.88,50.75 79.88,53.75 79.88,55.25 U3.14
VUSB
  Top 0.3: 163.75,52 162.75,52 162.15,51.4 | 162.15,51.4 157.5,46.75 149,46.75 149,46.5 PFMF.050.1.1 | J2.B4 163.75,56.5 163.75,56.75 J2.A9 163.4,56.48 163.09,56.48 162.92,56.31 162.92,54.92 162.15,54.15 162.15,51.4 | 163.75,52 163.75,51.75 J2.A4 | 163.75,52 J2.B9
(copper drawn outside any net)
  shapes: Top area x1